# Altium PCB Chronos.PcbDoc (part 6 of 6)
Units mm, origin at the board's own origin, x right, y up, seen from the top; angles counter-clockwise.
Board outline 74.94 x 59.01 mm, 8 copper layers (TOP, L02_GND, L03_SIG, L04_PWR, L05_GND, L06_SIG, L07_GND, BOTTOM), stack 1.624 mm thick; 413 components, 238 nets, 1566 pads, 873 vias.
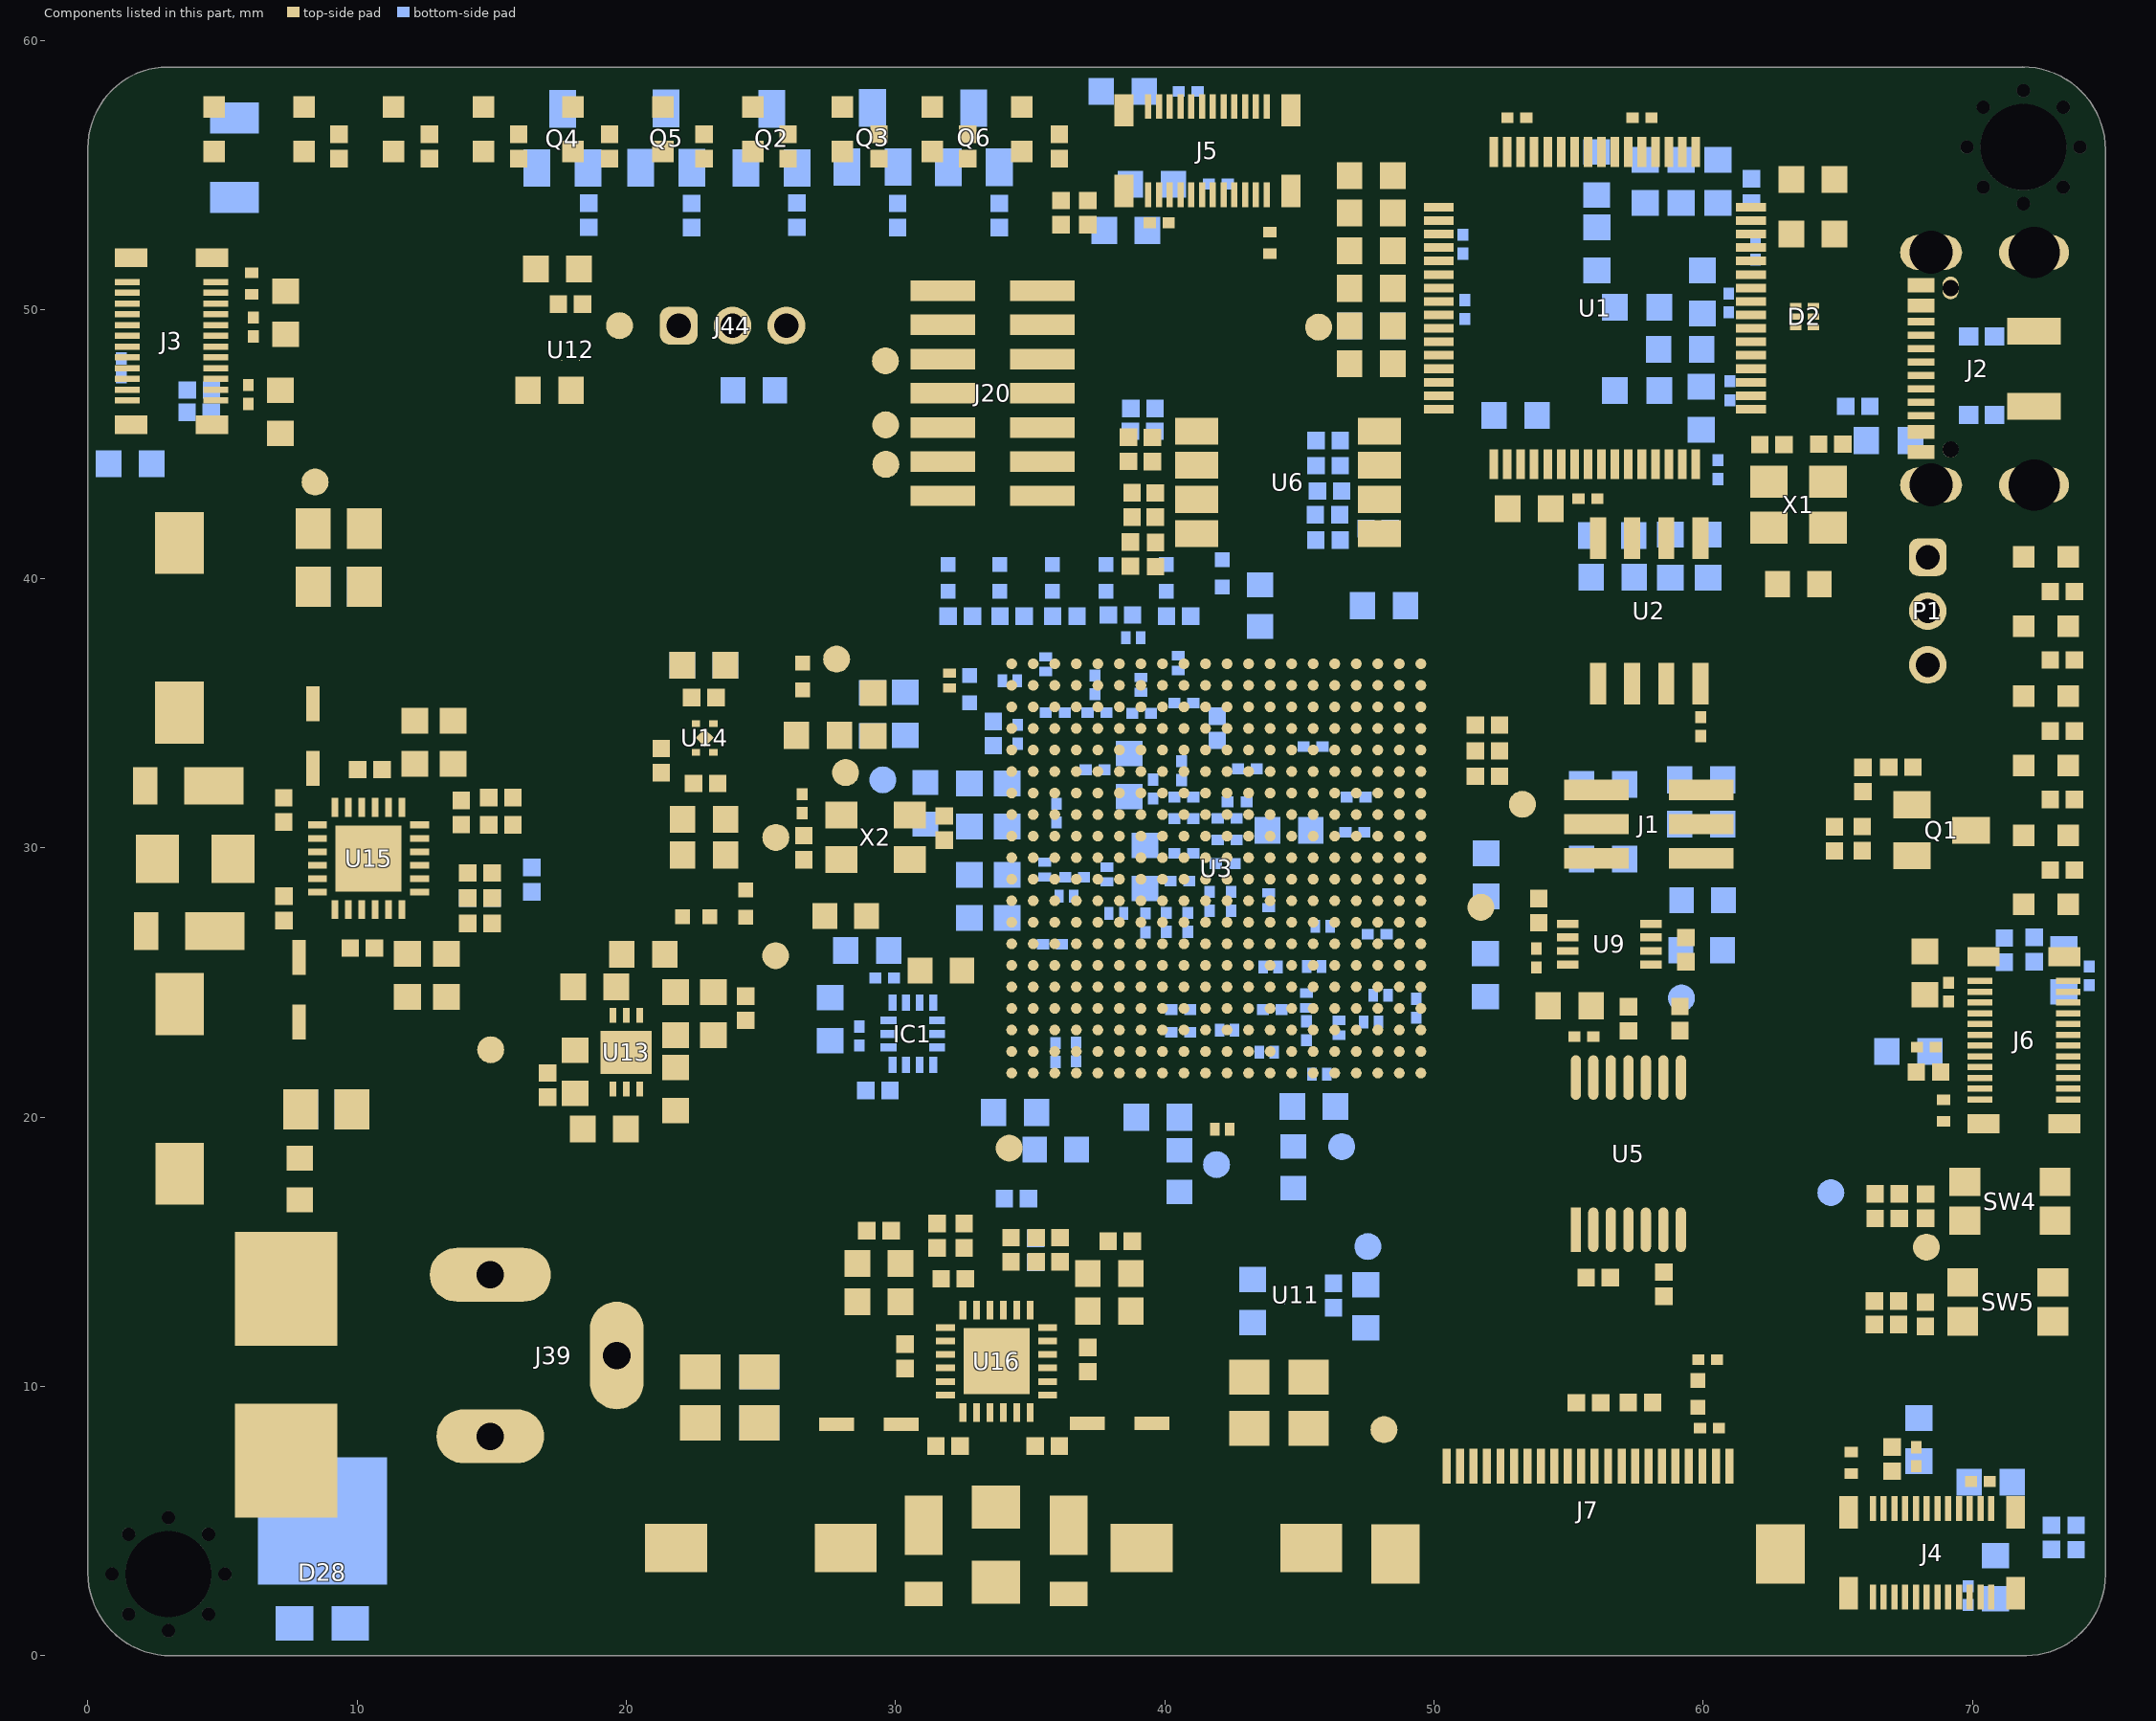
[diagram p11: the components of this part, seen from the top]

## Polygon pours and split planes (outlines as drawn) (continued)
GND on TOP "TOP-GND" (solid, remove dead copper, pour order 130): 3.434,30.625 3.434,28.56 2.687,27.812 2.687,26.252 2.456,26.021 0.813,26.021 0.638,26.197 0.638,32.99 0.83,33.183 2.51,33.183 2.618,33.075 2.618,31.472 3.434,30.656
GND on TOP "GND_L01_P126" (solid, pour order 126): 22.692,37.452 22.692,34.647 23.252,34.088 22.945,33.78 22.945,33.37 20.745,33.37 20.745,37.4 20.945,37.6 22.545,37.6
GND on TOP "GND_L01_P125" (solid, pour order 125): 17.554,25.348 17.538,25.331 17.173,25.331 16.785,24.943 16.785,21.357 16.828,21.4 24.745,21.4 24.745,24.113 24.754,24.123 23.53,25.348 18.504,25.348
V2P8 on TOP "V2P8_L01_P117" (solid, pour order 117): 18.122,48.88 17.945,49.058 17.945,50.825 17.766,51.003 17.766,52.6 19.945,52.6 20.145,52.4 20.145,51 19.945,50.8 18.976,50.8 18.745,50.569 18.745,48.6 18.399,48.6 18.197,48.802
GND on TOP "GND_L01_P120" (solid, pour order 120): 16.945,45.6 16.945,48.298 17.047,48.4 17.827,48.4 18.117,48.69 17.797,49.01 17.797,50.548 17.345,51 17.345,52.6 15.745,52.6 15.545,52.4 15.545,45.8 15.745,45.6
V1P8_LDO on TOP "V1P8_LDO_L01_P054" (solid, pour order 54): 20.37,23.516 20.37,25.148 22.529,25.148 22.829,25.448 22.829,26.573 22.829,27.826 24.754,27.826 24.754,26.573 24.754,24.123 21.792,24.123 21.185,23.516
NetFB8_1 on TOP "NETFB8_1_L01_P067" (solid, pour order 67): 22.545,27.2 22.545,30.224 22.562,30.241 21.612,30.241 21.612,27.148 21.613,27.147 22.545,27.147
VCCIO0 on TOP "VCCIO0_L01_P062" (solid, pour order 62): 39.363,42 39.537,42.175 41.98,42.175 41.98,41.036 41.945,41 37.145,41 36.945,41.2 36.945,41.8 37.145,42
V3P3 on TOP "V3P3_L01_P055" (solid, pour order 55): 23.643,19.648 23.643,21.048 20.888,21.048 20.62,21.316 20.37,21.316 20.37,20.108 20.829,19.648
NetC156_2 on TOP "TOP-N17079096" (solid, remove dead copper, pour order 9): 29.263,7.315 29.263,9.397 30.826,9.397 31.072,9.151 32.131,9.151 32.377,9.397 32.633,9.397 32.643,9.388 32.643,8.675 32.426,8.458 31.916,8.458 31.817,8.36 31.817,7.44 31.693,7.315
NetC157_1 on TOP "TOP-N17079015" (solid, remove dead copper, pour order 8): 34.863,9.374 34.863,8.546 34.942,8.467 35.653,8.467 35.742,8.378 35.742,8.199 35.742,7.456 35.78,7.417 37.859,7.417 37.937,7.495 37.937,8.874 37.937,9.194 37.733,9.398 36.661,9.398 36.427,9.163 35.371,9.163 35.136,9.398 34.886,9.398
NetC142_2 on TOP "TOP-N17076283" (solid, remove dead copper, pour order 3): 6.983,33.734 8.535,33.734 8.753,33.734 8.868,33.619 8.868,32.544 8.868,30.993 8.868,30.737 8.858,30.727 8.145,30.727 8.104,30.769 8.104,31.176 7.735,31.545 6.917,31.545 6.785,31.677 6.785,33.536
NetC143_2 on TOP "TOP-N17075942" (solid, remove dead copper, pour order 2): 8.822,29.037 7.179,29.037 6.245,28.103 3.902,28.103 3.307,27.507 3.307,26.286 2.431,25.41 2.431,23.068 2.696,22.804 5.202,22.804 6.259,22.804 6.473,23.018 6.473,24.158 6.473,27.399 6.932,27.858 7.653,27.858 7.709,27.914 7.709,28.28 8.157,28.728 8.211,28.728 8.881,28.728 8.881,28.979
V1P8 on TOP "V1P8_L01_P015" (solid, pour order 15): 43.945,2.8 46.993,2.8 46.993,9.151 46.745,9.4 38.548,9.4 38.548,7.401 42.944,7.401 43.945,6.4
NetC73_1 on TOP "NETC73_1_L01_P049" (solid, pour order 49): 60.117,9.55 60.117,6.375 59.355,6.375 cw(c59.355,6.401) 59.33,6.401 59.33,9.55
NetC157_2 on TOP "TOP-N17078984" (solid, remove dead copper, pour order 12): 34.373,9.386 34.373,8.562 34.373,7.599 34.847,7.125 35.738,6.234 35.738,4.096 35.738,3.747 37.155,3.747 37.953,2.948 40.295,2.948 40.56,3.213 40.56,5.719 40.56,6.776 40.346,6.99 39.206,6.99 35.719,6.99 35.505,7.204 35.505,8.17 35.449,8.226 34.933,8.226 34.636,8.523 34.636,8.727 34.636,9.398 34.385,9.398
NetC156_1 on TOP "TOP-N17079109" (solid, remove dead copper, pour order 11): 33.131,9.395 33.131,8.174 33.131,7.387 32.274,6.53 32.274,4.167 31.827,3.72 30.394,3.72 29.443,2.769 26.716,2.769 26.716,5.997 27.313,6.593 31.338,6.593 32.083,7.339 32.083,8.12 32.106,8.143 32.68,8.143 32.765,8.228 32.868,8.331 32.868,8.684 32.871,8.686 32.871,9.386 32.879,9.395
+12.0V on TOP "TOP-+12.0V 3" (solid, remove dead copper, pour order 10): 33.368,9.388 33.368,7.234 32.767,6.633 32.767,4.089 34.806,4.089 34.806,6.581 34.15,7.237 34.15,9.379 34.141,9.388
NetC142_1 on TOP "TOP-N17076208" (solid, remove dead copper, pour order 4): 8.878,30.232 7.657,30.232 7.022,30.232 6.841,30.413 6.165,31.089 3.65,31.089 3.203,31.536 3.203,32.969 2.371,33.801 2.371,36.382 2.44,36.451 5.676,36.451 6.076,36.051 6.076,31.897 6.693,31.28 7.932,31.28 7.932,30.73 8.167,30.495 8.17,30.492 8.869,30.492 8.878,30.484
+12.0V on TOP "+12.0V_L01_P001" (solid, pour order 1): 8.958,29.997 7.107,29.997 6.371,30.734 3.983,30.734 3.983,28.473 6.396,28.473 7.158,29.235 8.962,29.235
GND on BOTTOM "GND_L08_P153" (solid, pour order 153): 42.185,31.514 42.563,31.514 42.563,32.156 43.646,32.156 43.646,32.743 39.39,32.743 39.368,32.765 39.368,32.315 40.825,32.315 40.825,28.969 38.767,28.969 38.767,27.36 41.366,27.36 41.366,28.005 44.496,28.005 44.496,28.651 42.185,28.651
V1P8 on BOTTOM "V1P8_L08_P148" (solid, pour order 148): 2.004,46.556 2.845,45.715 2.845,43.772 1.895,43.772 1.895,44.852 0.637,46.11 0.293,46.11 0.293,47.644 0.453,47.803 1.824,47.803 2.004,47.623
V1P8 on BOTTOM "V1P8_L08_P147" (solid, pour order 147): 41.016,58.75 41.016,57.634 40.761,57.379 38.705,57.379 38.705,58.649 38.795,58.739
V1P8 on BOTTOM "BOTTOM-V1P8" (solid, pour order 144): 40.628,7.597 40.679,1.958 42.584,0.053 72.484,0.053 ccw(c72.02,2.806) 74.773,2.342 74.773,25.128 72.055,25.128 70.91,23.983 70.91,2.596 45.253,2.596 43.861,3.988 43.861,8.966 43.404,9.423 42.363,9.423 41.916,9.87 41.916,12.56 42.551,13.195 44.015,13.195 44.261,12.95 44.651,12.95 44.651,13.742 44.643,13.75 44.651,13.758 44.651,14.285 44.481,14.455 40.679,14.455 40.679,9.49 40.679,9.002 40.628,8.951
GND on BOTTOM "GND_L08_P145" (solid, pour order 145): 42.769,12.853 44.676,12.853 44.861,13.037 44.493,13.405 44.861,13.773 45.38,13.253 46.594,13.253 46.794,13.053 48.522,13.053 48.522,11.265 47.12,9.863 42.51,9.863 42.218,10.155 42.234,10.171 42.234,12.852 42.769,12.852
V1P2 on BOTTOM "V1P2_L08_P083" (solid, remove dead copper, pour order 83): 45.071,14.343 45.165,14.438 48.306,14.438 48.545,14.2 48.545,13.404 48.443,13.303 46.969,13.303 46.766,13.506 45.315,13.506 45.071,13.75
V1P8 on BOTTOM "V1P8_L08_P086" (solid, remove dead copper, pour order 86): 72.945,24.8 74.745,24.8 74.745,23.4 72.945,23.4
VCCIO6 on BOTTOM "VCCIO6_L08_P128" (solid, pour order 128): 34.945,27.875 30.877,27.875 30.745,27.743 30.745,26.4 31.145,26 34.145,26 34.945,26.8
VCCIO2 on BOTTOM "VCCIO2_L08_P114" (solid, pour order 114): 59.945,27 47.32,27 47.32,24.8 48.345,24.8 48.745,24.4 48.745,24.175 50.12,24.175 51.345,25.4 59.945,25.4
VCCIO1 on BOTTOM "VCCIO1_L08_P108" (solid, pour order 108): 51.32,28.8 56.345,28.8 56.545,29 56.545,30.2 57.945,30.2 58.545,30.8 58.545,33.4 59.745,33.4 59.945,33.2 59.945,30.2 70.745,30.2 72.345,31.8 72.345,40.32 73.545,40.32 73.545,31 71.545,29 60.345,29 59.945,28.6 59.945,27.2 49.745,27.2 47.235,29.709 47.235,32.094 50.251,32.094 51.145,31.2 51.145,28.975
GND on BOTTOM "GND_L08_P133" (solid, pour order 133): 9.728,38.839 12.055,38.839 12.055,42.841 12.073,42.859 12.064,42.868 9.611,42.868 9.611,38.957
GND on BOTTOM "GND_L08_P070" (solid, remove dead copper, pour order 70): 5.945,1.8 5.945,0.2 17.945,0.2 21.345,3.6 21.345,12.6 20.545,13.4 18.545,13.4 18.345,13.2 18.345,9.8 17.745,9.2 12.945,9.2 12.745,9 12.745,2.6 11.945,1.8
GND on BOTTOM "GND_L08_P132" (solid, pour order 132): 9.16,19.544 9.304,19.4 12.345,19.4 12.345,21.2 12.145,21.4 9.145,21.4
V1P8 on BOTTOM "V1P8_L08_P082" (solid, remove dead copper, pour order 82): 42.769,14.453 44.483,14.453 44.651,14.285 44.651,13.75 44.643,13.75 44.493,13.6 44.493,13.21 44.501,13.21 44.651,13.06 44.651,12.95 44.261,12.95 43.908,13.303 41.069,13.303 41.069,14.17 41.331,14.431
+12.0V on BOTTOM "+12.0V_L08_P073" (solid, remove dead copper, pour order 73): 9.945,15 9.145,15.8 2.145,15.8 1.345,15 1.345,10.4 1.745,10 9.545,10 9.945,10.4
NetC27_1 on BOTTOM "NETC27_1_L08_P068" (solid, pour order 68): 32.47,35.675 32.47,34.349 34.984,34.328 35.149,34.493 35.149,35.2 33.494,35.2 33.02,35.675
VCC_CORE_V1P0 on BOTTOM "VCC_CORE_V1P0_L08_P064" (solid, pour order 64): 32.145,34.8 28.545,34.8 28.545,33.6 32.145,33.6
VCCIO7 on BOTTOM "VCCIO7_L08_P056" (solid, pour order 56): 36.571,31.4 36.622,31.451 36.622,32.639 37.226,32.639 37.308,32.721 37.308,33.401 36.622,33.401 36.419,33.198 36.394,33.2 30.625,33.2 30.625,31.925 34.819,31.925 35.345,31.4
VCCIO4 on BOTTOM "VCCIO4_L08_P052" (solid, pour order 52): 40.545,24.6 40.545,23 41.02,22.525 41.02,18.325 41.03,18.315 39.945,18.315 39.945,24.625
VCCIO3 on BOTTOM "VCCIO3_L08_P051" (solid, pour order 51): 44.345,18.458 44.345,23.575 44.12,23.8 44.12,24.6 45.005,24.6 45.018,24.613 45.065,24.566 45.065,23.091 46.054,23.091 46.145,23 46.145,22.204 45.219,22.204 45.219,18.458
VCCIO0 on L04_PWR "NONET_L-01_P-001" (solid, pour order 105): 27.545,49.6 37.745,49.6 51.145,36.2 51.145,33.4 50.745,33 45.945,33 45.485,33.46 45.485,38.86 42.745,41.6 25.945,41.6 25.945,48
VCCIO6 on L04_PWR "VCCIO6_L04_P079" (solid, pour order 79): 36.765,29.453 36.765,25.621 31.524,25.621 30.069,27.076 30.069,30.276 29.509,30.836 25.929,30.836 25.745,31.02 25.745,31.413 25.931,31.6 30.808,31.6 31.128,31.28 31.128,28.217 32.024,27.32 34.945,27.32 34.945,28.579 35.795,29.453
VCCIO6 on L04_PWR "L04_PWR-VCCIO6" (solid, remove dead copper, pour order 138): 74.787,23.441 74.39,23.441 73.252,24.58 73.252,27.648 71.553,29.23 66.387,34.396 66.387,57.558 65.35,58.595 3.387,58.595 1.596,56.803 1.596,44.437 4.184,44.437 4.184,55.776 5.008,56.6 61.345,56.6 62.987,54.957 62.987,31.194 66.345,27.837 66.345,25.6 70.49,25.6 71.037,25.054 71.037,2.8 53.945,2.8 50.545,6.2 50.545,19.351 49.698,20.195 37.332,20.195 36.765,20.761 36.765,25.621 31.524,25.621 31.524,19.257 32.392,18.39 36.528,18.39 46.528,18.39 47.345,17.573 47.345,2.2 48.689,0.855 73.448,0.855 74.787,2.195
V2P8 on L04_PWR "V2P8_L04_P109" (solid, pour order 109): 54.072,3.072 71.017,3.072 71.017,24.788 70.404,25.4 66.345,25.4 66.345,23.6 68.945,23.6 68.945,6.2 68.745,6 56.145,6 54.145,8 54.145,16.4 56.745,19 56.745,30.2 53.545,33.4 53.545,38.6 40.545,51.6 17.145,51.6 17.145,50 17.345,49.8 37.745,49.8 51.345,36.2 51.345,33.112 50.745,32.512 50.745,6.4
V1P2 on L04_PWR "V1P2_L04_P116" (solid, pour order 116): 11.145,53.8 9.856,52.511 9.856,48.4 6.745,48.4 6.745,55 8.345,56.6 13.945,56.6 60.945,56.6 62.67,54.875 62.67,31.075 66.145,27.6 66.145,23.8 66.545,23.4 68.645,23.4 68.645,6.5 68.345,6.2 62.345,6.2 61.945,6.6 61.945,27.2 59.887,29.257 59.887,48.769 54.856,53.8
V1P8 on L04_PWR "V1P8_L04_P141" (solid, remove dead copper, pour order 141): 67.166,39.172 67.778,39.784 74.318,39.784 74.852,39.251 74.852,23.704 74.589,23.441 73.811,23.441 73.295,23.957 73.295,36.543 72.004,37.833 67.849,37.833 67.28,38.402 cw(c67.603,38.725) 67.147,38.745
V1P8_VCCAUX on L04_PWR "L04_PWR-V1P8_VCCAUX" (solid, pour order 107): 42.611,25.4 43.745,26.533 43.745,27.71 41.659,27.71 40.749,26.8 39.945,26.8 39.945,28.835 40.11,29 42.155,29 42.315,28.84 42.935,29.46 42.935,30.023 42.224,30.735 40.696,30.735 40.696,32.04 37.785,32.04 31.883,32.04 31.276,31.433 31.276,28.068 33.945,25.4
V1P8 on L04_PWR "V1P8_L04_P101" (solid, remove dead copper, pour order 101): 29.866,28.524 29.866,27.056 29.867,27.056 31.145,25.712 31.145,19.6 32.545,18.2 46.345,18.2 46.945,17.6 46.945,6.8 40.545,6.8 40.545,15.747 31.198,15.747 27.745,19.2 27.745,24 26.545,25.2 24.945,25.2 24.945,26.8 24.945,28.2 23.945,29.2 23.945,32 25.171,32 25.345,31.826 25.345,30 26.545,28.8 29.59,28.8
V3P3 on L04_PWR "L04_PWR-V3P3" (solid, pour order 129): 7.065,19.6 23.745,19.6 23.945,19.8 23.945,21.568 23.043,22.469 19.614,22.469 18.868,23.216 18.868,47.877 16.945,49.8 16.945,51.8 40.545,51.8 53.745,38.6 53.745,33.4 58.345,28.8 58.345,6.6 58.745,6.2 61.345,6.2 61.745,6.6 61.745,27 59.887,28.857 59.887,48.457 54.545,53.8 13.945,53.8 13.545,53.4 13.545,46.2 15.345,44.4 15.345,24.8 13.345,22.8 6.971,22.8 6.745,22.573 6.745,19.921
V1P8_LDO on L04_PWR "V1P8_LDO_L04_P099" (solid, remove dead copper, pour order 99): 24.304,32.36 30.12,32.36 30.628,32.868 30.628,36.485 30.743,36.6 32.545,36.6 32.545,38.2 32.945,38.6 41.945,38.6 43.145,39.8 43.145,40.8 42.545,41.4 41.145,41.4 41.145,40.5 40.844,40.2 39.978,40.2 39.578,40.6 35.945,40.6 35.345,40 27.945,40 26.145,38.2 26.145,36.8 25.159,35.814 22.297,35.814 22.145,35.662 22.145,25.2 24.745,25.2 24.945,25.4 24.945,28.2 23.945,29.2 23.945,32
+12.0V on L04_PWR "L04_PWR-+12.0V" (solid, remove dead copper, pour order 104): 1.145,6.6 1.945,5.8 5.93,5.8 7.674,4.056 35.201,4.056 35.545,4.4 35.545,6 35.145,6.4 16.745,6.4 12.545,6.4 10.145,8.8 10.145,15.4 9.345,16.2 6.945,16.2 6.345,16.8 6.345,22.834 6.711,23.2 8.945,23.2 8.945,26.6 8.945,30.6 8.345,31.2 2.745,31.2 2.345,30.8 2.345,16.8 1.145,15.6
VCC_CORE_V1P0 on L04_PWR "VCC_CORE_V1P0_L04_P066" (solid, pour order 66): 27.545,8.017 27.545,19 27.545,24 26.545,25 22.145,25 21.945,25.2 21.945,35.462 22.474,35.992 22.745,35.992 22.745,40.878 22.297,41.326 19.782,41.326 19.145,40.688 19.145,23.6 19.745,23 24.345,23 24.345,8.061 24.806,7.6 27.128,7.6
VCCIO1 on L04_PWR "VCCIO1_L04_P112" (solid, pour order 112): 56.945,30.2 58.145,30.2 58.145,6.6 57.745,6.2 56.145,6.2 54.345,8 54.345,16.4 56.945,19
NetC124_1 on L04_PWR "NONET_L-01_P-001" (solid, pour order 81): 45.309,31.2 45.309,38.252 44.761,38.8 42.707,38.8 42.345,38.438 42.345,37.2 42.945,36.6 42.945,34.387 43.649,33.683 43.649,32.838 43.145,32.334 43.145,31.466 43.411,31.2
V1P0_LDO on L04_PWR "V1P0_LDO_L04_P098" (solid, remove dead copper, pour order 98): 40.145,41.4 34.945,41.4 23.545,41.4 22.945,40.8 22.945,36.436 23.381,36 25.345,36 26.145,36.8 26.145,38.2 27.945,40 35.345,40 36.145,40.8 39.745,40.8 40.345,40.2 40.844,40.2 41.095,40.45
VCC_CORE_V1P0 on L04_PWR "L04_PWR-VCC_CORE_V1P0" (solid, pour order 84): 40.503,30.486 40.822,30.735 41.982,30.734 42.215,30.733 42.727,30.242 42.889,30.242 42.889,29.707 42.182,29 40.11,29 39.945,28.835 39.945,26.8 40.749,26.8 40.982,27.033 41.561,27.033 42.329,27.8 43.745,27.8 43.745,33.6 43.545,33.8 32.745,33.8 32.545,34 32.545,34.6 32.345,34.8 30.945,34.8 30.745,34.6 30.745,32.4 30.945,32.2 40.489,32.2 40.489,31.307 40.181,30.998 40.079,30.998 40.079,30.742 40.335,30.486
GND on L02_GND "GND_L02_P122" (solid, pour order 122): 0.904,0.898 0.898,0.904 cw(c3.066,3.072) 0,3.072 0,55.985 cw(c3.066,55.985) 0.898,58.153 cw(c2.942,56.11) 2.942,59 71.945,59 71.871,59.009 cw(c71.871,55.943) 74.039,58.111 74.045,58.105 cw(c71.877,55.937) 74.943,55.937 74.943,3.023 cw(c71.877,3.023) 74.045,0.855 cw(c72.001,2.899) 72.001,0.009 cw(c71.98,0.03) 71.98,0 3.072,0 cw(c3.072,3.066)
GND on L05_GND "GND_L05_P123" (solid, pour order 123): 0.904,0.898 0.898,0.904 cw(c3.066,3.072) 0,3.072 0,55.985 cw(c3.066,55.985) 0.898,58.153 cw(c2.942,56.11) 2.942,59 71.945,59 71.871,59.009 cw(c71.871,55.943) 74.039,58.111 74.045,58.105 cw(c71.877,55.937) 74.943,55.937 74.943,3.023 cw(c71.877,3.023) 74.045,0.855 cw(c72.001,2.899) 72.001,0.009 cw(c71.98,0.03) 71.98,0 3.072,0 cw(c3.072,3.066)
GND on L07_GND "GND_L07_P134" (solid, pour order 134): 0.904,0.898 0.898,0.904 cw(c3.066,3.072) 0,3.072 0,55.985 cw(c3.066,55.985) 0.898,58.153 cw(c2.942,56.11) 2.942,59 71.945,59 71.871,59.009 cw(c71.871,55.943) 74.039,58.111 74.045,58.105 cw(c71.877,55.937) 74.943,55.937 74.943,3.023 cw(c71.877,3.023) 74.045,0.855 cw(c72.001,2.899) 72.001,0.009 cw(c71.98,0.03) 71.98,0 3.072,0 cw(c3.072,3.066)
GND on L03_SIG "GND_L03_P150" (solid, pour order 150): 0.904,0.898 0.898,0.904 cw(c3.066,3.072) 0,3.072 0,55.985 cw(c3.066,55.985) 0.898,58.153 cw(c2.942,56.11) 2.942,59 71.945,59 71.871,59.009 cw(c71.871,55.943) 74.039,58.111 74.045,58.105 cw(c71.877,55.937) 74.943,55.937 74.943,3.023 cw(c71.877,3.023) 74.045,0.855 cw(c72.001,2.899) 72.001,0.009 cw(c71.98,0.03) 71.98,0 3.072,0 cw(c3.072,3.066)
GND on L06_SIG "GND_L06_P151" (solid, pour order 151): 0.904,0.898 0.898,0.904 cw(c3.066,3.072) 0,3.072 0,55.985 cw(c3.066,55.985) 0.898,58.153 cw(c2.942,56.11) 2.942,59 71.945,59 71.871,59.009 cw(c71.871,55.943) 74.039,58.111 74.045,58.105 cw(c71.877,55.937) 74.943,55.937 74.943,3.023 cw(c71.877,3.023) 74.045,0.855 cw(c72.001,2.899) 72.001,0.009 cw(c71.98,0.03) 71.98,0 3.072,0 cw(c3.072,3.066)

## Keep-outs
Keep-Out Layer:
  lines w0.2: 71.871,59.009 cw(c71.871,55.943) 74.039,58.111 ; 71.945,59 2.942,59 ccw(c2.942,56.11) 0.898,58.153 ccw(c3.066,55.985) 0,55.985 0,3.072 ccw(c3.066,3.072) 0.898,0.904 0.904,0.898 ccw(c3.072,3.066) 3.072,0 4.145,0 70.545,0 71.98,0 ccw(c71.98,0.03) 72.001,0.009 ccw(c72.001,2.899) 74.045,0.855 ccw(c71.877,3.023) 74.943,3.023 74.943,55.937 ccw(c71.877,55.937) 74.045,58.105

## Other copper
TOP:
  region net GND: 6.336,51.161 6.343,51.168 6.556,51.168 6.556,52.151 6.513,52.194 5.657,52.194 5.657,51.161
  region net V2P8: 69.329,6.113 70.013,6.113 70.185,6.284 70.185,6.894 70.105,6.974 69.309,6.974 69.216,6.881 69.216,6.226
  region net V1P2: 8.398,49.712 6.848,49.712 6.848,48.485 6.869,48.463 8.479,48.463 8.479,49.632
  region net NetD28_3: 5.459,3.427 5.459,9.035 5.717,9.293 9.466,9.293 10.745,10.571 10.745,15.6 11.145,16 17.945,16 18.145,15.8 18.145,11.6 16.345,9.8 13.145,9.8 12.345,9 12.345,3.4 11.345,2.4 6.485,2.4
  region net GND: 9.617,42.609 9.617,38.95 11.695,38.95 11.745,39 11.745,42.6
  region net GND: 31.945,2.8 32.745,3.6 34.745,3.6 35.545,2.8 37.545,2.8 37.545,0.6 29.545,0.6 29.545,2.2 30.145,2.8
  region net V2P8: 68.741,25.029 68.57,25.2 67.145,25.2 67.145,24.064 68.738,24.064
  region net NetFB7_1: 26.82,33.682 26.82,36.162 25.842,36.162 25.842,33.682
  region net V1P0_LDO: 23.343,34.337 23.162,34.518 23.133,34.518 23.003,34.648 23.003,37.458 23.145,37.6 26.745,37.6 26.945,37.4 26.945,36.725 26.82,36.6 25.945,36.6 25.545,36.2 25.545,34.8 24.945,34.2 23.45,34.2 23.313,34.337
  region net V1P8: 23.133,29.241 23.133,33.658 23.313,33.837 23.313,33.838 24.507,33.838 24.745,33.6 24.745,29.241
  region net V3P3: 8.809,24.104 8.809,17.894 6.861,17.894 6.861,24.112 7.037,24.288 8.63,24.284
  region net NetL15_1: 8.598,17.678 6.447,17.678 4.847,19.279 2.434,19.279 2.231,19.075 2.231,16.586 2.417,16.4 8.598,16.4
  region net NetC143_1: 8.862,28.485 8.047,28.485 8.047,27.94 7.77,27.663 6.955,27.663 6.955,25.324 7.133,25.146 8.708,25.146 8.862,25.301
L03_SIG:
  pour cut-out: 8.345,48 8.276,48.069 8.276,50.165 5.419,50.165 5.355,50.101 5.355,47.93
  pour cut-out: 69.82,4.762 69.82,2.032 69.583,2.032 68.705,2.91 68.705,4.823 69.778,4.823 69.819,4.782
L06_SIG:
  pour cut-out: 49.589,4.28 54.008,4.28 55.126,5.397 55.126,10.405 55.756,11.035 62.455,11.035 63.533,9.957 63.533,0.292 70.12,0.292 70.12,16.895 73.637,20.411 73.637,23.387 71.532,25.492 71.532,37.213 47.949,37.213 46.807,38.354 46.807,56.464 45.446,57.826 39.178,57.826 38.235,56.883 38.235,52.667 31.275,45.707 14.461,45.707 7.984,52.184 3.203,52.184 1.557,50.539 1.557,48.247 0.313,48.247 0.239,48.321 0.265,45.352 1.024,45.352 6.307,40.068 26.722,40.068 27.186,39.605 27.186,37.274 29.167,35.293 30.238,35.293 30.793,34.738 30.793,23.654 40.845,13.602 48.007,13.602 48.395,13.214 48.395,5.474
  pour cut-out: 34.935,35.42 36.1,36.584 36.1,36.882 35.554,37.428 33.81,35.684 33.81,35.272
BOTTOM:
  region net GND: 25.935,10.141 25.695,9.9 21.945,9.9 21.945,12.2 22.145,12.4 25.745,12.4 25.935,12.209
  region net GND: 24.913,24.892 24.913,21.311 17.775,21.311 17.775,24.892
  region net V3P3: 61.428,28.643 61.428,25.418 60.168,25.418 60.168,28.57 60.241,28.643
  region net GND: 9.094,30.991 9.094,28.298 11.817,28.298 11.817,30.991
  region net VCCIO0: 24.945,47.6 26.945,47.6 26.945,46.4 24.945,46.4
  region net V3P3: 8.745,22.8 6.745,22.8 6.745,19.4 8.745,19.4
  region net NetD28_3: 5.44,4.29 5.44,8.53 9.68,8.53 10.745,9.595 10.745,15.6 11.145,16 17.945,16 18.145,15.8 18.145,11.6 16.345,9.8 12.945,9.8 12.145,9 12.145,3.2 11.345,2.4 6.511,2.4 5.458,3.453
  region net V1P0_LDO: 23.203,37.286 25.059,37.286 25.145,37.2 25.145,36.2 24.945,36 23.242,36 23.207,36.035
  region net VCC_CORE_V1P0: 24.145,9.6 24.145,7.6 27.345,7.6 27.345,9.6
  region net V5P0: 9.206,40.691 7.006,40.691 7.006,37.389 9.206,37.389

## Silkscreen, mask and mechanical layers (free items; w line width, h text height)
Top Overlay:
  lines w0.127: 12.913,34.3 12.913,33.513 12.964,33.513 ; 14.284,32.827 14.284,33.487 ; 15.504,13.751 17.256,13.751
  text "2.8V" at 15.427,52.848 h1.02 r90
  text "1.8V" at 18.805,52.848 h1.02 r90
  text "1.0V" at 28.787,52.848 h1.02 r90
  text "12V" at 5.428,52.832 h1.02 r90
  text "5V" at 8.902,52.832 h1.02 r90
  text "1.2V" at 25.485,52.823 h1.02 r90
  text "3.3V" at 12.074,52.797 h1.02 r90
  text "ACT" at 35.479,52.807 h1.02 r90
  text "1.0VL" at 32.14,52.558 h1.02 r90
  text "1.8VL" at 22.081,52.532 h1.02 r90
  text "UART" at 34.463,52.4 h1.02 r90
  text "CHRONOS    V1.0" at 15.548,39.135 h1.52
OUTLINE_M:
  lines w0.025: -178.706,-235.788 -173.706,-235.788 ; -178.706,-185.788 -173.706,-185.788 ; -178.706,-135.788 -173.706,-135.788 ; -178.706,-85.788 -168.706,-85.788 ; -178.706,-35.788 -173.706,-35.788 ; -178.706,14.212 -173.706,14.212 ; -178.706,64.212 -173.706,64.212 ; -173.706,99.212 -13.706,99.212 ; -173.706,106.712 -13.706,106.712 ; -149.706,84.212 -149.706,106.712 ; -141.706,-290.788 -141.706,-285.788 ; -141.706,114.212 -141.706,119.212 ; -129.706,84.212 -129.706,106.712 ; -91.705,-290.788 -91.705,-285.788 ; -91.705,114.212 -91.705,119.212 ; -41.706,-290.788 -41.706,-285.788 ; -41.706,114.212 -41.706,119.212 ; -33.706,84.212 -33.706,106.712 ; -13.706,84.212 -13.706,114.212 ; 8.295,-290.788 8.295,-285.788 ; 8.295,114.212 8.295,119.212 ; 58.294,-290.788 58.294,-285.788 ; 58.294,114.212 58.294,119.212 ; 108.294,-290.788 108.294,-280.788 ; 108.294,109.212 108.294,119.212 ; 158.295,-290.788 158.295,-285.788 ; 158.295,114.212 158.295,119.212 ; 208.294,-290.788 208.294,-285.788 ; 208.294,114.212 208.294,119.212 ; 258.294,-290.788 258.294,-285.788 ; 258.294,114.212 258.294,119.212 ; 308.294,-290.788 308.294,-285.788 ; 308.294,114.212 308.294,119.212 ; 358.294,-290.788 358.294,-285.788 ; 358.294,114.212 358.294,119.212 ; 385.294,-85.788 395.295,-85.788 ; 390.295,-235.788 395.295,-235.788 ; 390.295,-185.788 395.295,-185.788 ; 390.295,-135.788 395.295,-135.788 ; 390.295,-35.788 395.295,-35.788 ; 390.295,14.212 395.295,14.212 ; 390.295,64.212 395.295,64.212 ; -178.706,-290.788 -178.706,119.212 395.295,119.212 395.295,-290.788 -178.706,-290.788 ; -173.706,-285.788 -173.706,114.212 390.295,114.212 390.295,-285.788 -173.706,-285.788
  text "12" at -169.246,114.962 h3.17
  text "11" at -119.245,114.962 h3.17
  text "10" at -69.246,114.962 h3.17
  text "9" at -17.976,114.962 h3.17
  text "8" at 32.025,114.962 h3.17
  text "7" at 82.024,114.962 h3.17
  text "6" at 132.025,114.962 h3.17
  text "5" at 182.024,114.962 h3.17
  text "4" at 232.024,114.962 h3.17
  text "3" at 282.025,114.962 h3.17
  text "2" at 332.024,114.962 h3.17
  text "1" at 382.024,114.962 h3.17
  text "REVISIONS" at -102.849,109.212 h2.54
  text "APPROVED" at -169.834,101.712 h2.54
  text "DATE" at -143.77,101.712 h2.54
  text "DESCRIPTION" at -92.882,101.712 h2.54
  text "REV" at -26.754,101.712 h2.54
  text "A" at -177.475,87.462 h3.17
  text "A" at 391.524,87.462 h3.17
  text "B" at -177.475,37.462 h3.17
  text "B" at 391.524,37.462 h3.17
  text "C" at -177.475,-12.538 h3.17
  text "C" at 391.524,-12.538 h3.17
  text "D" at -177.475,-62.538 h3.17
  text "D" at 391.524,-62.538 h3.17
  text "E" at -177.475,-112.538 h3.17
  text "E" at 391.524,-112.538 h3.17
  text "F" at -177.475,-162.538 h3.17
  text "F" at 391.524,-162.538 h3.17
  text "G" at -177.475,-212.538 h3.17
  text "G" at 391.524,-212.538 h3.17
  text "H" at -177.475,-262.538 h3.17
  text "H" at 391.524,-262.538 h3.17
  text "A2" at -169.246,-290.038 h3.17
  text "11" at -119.245,-290.038 h3.17
  text "10" at -69.246,-290.038 h3.17
  text "9" at -17.976,-290.038 h3.17
  text "8" at 32.025,-290.038 h3.17
  text "7" at 82.024,-290.038 h3.17
  text "6" at 132.025,-290.038 h3.17
  text "5" at 182.024,-290.038 h3.17
  text "4" at 232.024,-290.038 h3.17
  text "3" at 282.025,-290.038 h3.17
  text "2" at 332.024,-290.038 h3.17
  text "1" at 382.024,-290.038 h3.17
FAB_DATA:
  text "REFER NOTE 23" at 99.409,51.913 h2.54
  text "NOTES: UNLESS OTHERWISE SPECIFIED" at 168.656,49.24 h2.54
  text "REFER NOTE 23" at 99.48,45.406 h2.54
  text "1.  MATERIAL: FR-4" at 168.809,41.171 h2.54
  text "2.  GENERAL PLATING - ENIG" at 168.454,35.1 h2.54
  text "3.  ALL HOLES ARE PLATED THRU UNLESS OTHERWISE SPECIFIED" at 168.802,27.968 h2.54
  text "MINIMUM PLATING FOR ALL THRU HOLE SHOULD BE O.OO1\" Cu" at 176.01,22.266 h2.54
  text "4.  THROUGH HOLES PLATING THICKNESS SHOULD BE CONTROLLED BETWEEN 1.0 TO 1.5 MILS PER SIDE." at 168.568,16.322 h2.54
  text "5.  SILKSCREEN BOTH SIDES WITH NON-CONDUCTIVE WHITE INK" at 168.599,10.721 h2.54
  text "6.  FABRICATE PER DIMENSIONS SHOWN." at 168.751,5.743 h2.54
  text "7.  SOLDER MASK TOP AND BOTTOM SIDES WITH" at 168.624,0.968 h2.54
  text "LIQUID PHOTO IMAGABLE OR DRY FILM" at 169.208,-3.096 h2.54
  text "SOLDER MASK.  COLOR BLACK." at 169.107,-7.491 h2.54
  text "8.  TOTAL BOARD THICKNESS:  62 mil+/- 6 mil" at 169.005,-12.317 h2.54
  text "6 LAYER CONSTRUCTION." at 169.093,-16.33 h2.54
  text "REFER STACKUP" at 236.581,-16.553 h2.54
  text "9.  WARP & TWIST: SHALL NOT EXCEED 0.005 INCHES PER INCH" at 169.52,-22.879 h2.54
  text "10.  THIS IS A ROHS COMPLIANT BOARD" at 167.105,-29.126 h2.54
  text "11.  BOARD MUST BE UL 94V-1 APPROVED." at 167.554,-33.884 h2.54
  text "12.  FABRICATE BOARD PER IPC-A-600D STANDARD." at 167.554,-39.98 h2.54
  text "13.  CLIP SILKSCREEN ON NO MASK AREA." at 167.554,-44.933 h2.54
  text "14.  TEARDROPS SHOULD NOT BE ADDED ON ANY AREA WITHOUT PRIOR APPROVAL FROM PACTRON." at 167.486,-50.099 h2.54
  text "15.  NO VENDOR LOGO, ART WORKS SHOULD NOT BE" at 167.821,-55.321 h2.54
  text "CHANGED WITHOUT PRIOR APPROVAL FROM PACTRON" at 180.65,-60.955 h2.54
  text "16.  DEBURR ALL SHARP EDGES" at 167.976,-67.056 h2.54
  text "17.  REMOVE UNUSED PADS IN ALL INNER LAYERS." at 167.663,-71.829 h2.54
  text "18.  BOARD DIMENSIONS ARE IN INCHES[MM]." at 167.811,-76.573 h2.54
  text "19.  PROVIDE SOFT COPY OF TDR REPORT FOR OUTER LAYERS." at 167.841,-82.09 h2.54
  text "20.  ALL THE TRACE WIDTH MENTIONED IN IMPEDANCE TABLE ARE FINISHED TRACE WIDTH" at 167.994,-87.437 h2.54
  text "THERE SHOULD NOT BE ANY DEVIATIONS IN TRACE WIDTH AFTER MANUFACTURING" at 180.567,-91.755 h2.54
  text "21.  NICKEL CONTENT ON OUTER LAYERS SHOULD BE VERY MINIMAL POSSIBLE" at 168.248,-96.2 h2.54
  text "TRY TO ACHIEVE THICKNESS IN OUTER LAYER METAL WITH MORE COPPER INSTEAD OF MORE NICKEL" at 180.821,-100.518 h2.54
  text "22.  IF REQUIRED CAN IGNORE THE TRACES THAT ARE <0.5 INCH FOR TDR MEASUREMENT. BUT SETUP" at 168.121,-105.852 h2.54
  text "NEED TO BE DONE TO MEET IMPEDANCE REQUIREMENT" at 181.049,-110.805 h2.54
  text "23.  ALL THESE DRILLS  NEED TO BE NON CONDUCTIVE VIA PLUGGING FROM BOTTOM SIDE." at 167.806,-115.758 h2.54
  text "24.  ALL HOLE SIZES MENTIONED IN DRILL CHART SHOULD BE CONSIDERED AS FINISHED HOLE SIZE." at 167.762,-120.488 h2.54
FAB_DRAWING:
  text "FAB" at -7.049,-249.052 h1.6
  text "FAB DRAWING" at 268.295,-258.788 h2.54
  text "1 OF 1" at 384.199,-284.288 h2.54
PROBENUM_BOTTOM:
  text "TESTPIN NUMBER" at -41.706,-258.788 h2.54
  text "SECONDARY-SIDE" at -41.706,-263.788 h2.54
  text "2 OF 2" at -169.802,-284.288 h2.54
  text "2 OF 2" at -169.802,-284.288 h2.54
REFDES_BOTTOM:
  text "REFDES CENTER" at -41.706,-258.788 h2.54
  text "REFDES CENTER" at -41.706,-258.788 h2.54
  text "SECONDARY-SIDE" at -41.706,-263.788 h2.54
  text "SECONDARY-SIDE" at -41.706,-263.788 h2.54
  text "2 OF 2" at -169.802,-284.288 h2.54
ASSEMBLY_TOP:
  text "ASSEMBLY" at 268.295,-258.788 h2.54
  text "PRIMARY-SIDE" at 268.295,-263.788 h2.54
  text "1 OF 2" at 384.199,-284.288 h2.54
REFDES_TOP:
  text "REFDES CENTER" at 268.295,-258.788 h2.54
  text "PRIMARY-SIDE" at 268.295,-263.788 h2.54
  text "1 OF 2" at 384.199,-284.288 h2.54
PROBENUM_TOP:
  text "TESTPIN NUMBER" at 268.295,-258.788 h2.54
  text "PRIMARY-SIDE" at 268.295,-263.788 h2.54
  text "1 OF 2" at 384.199,-284.288 h2.54
PANEL_DRAWING:
  text "PANEL DRAWING" at 268.295,-258.788 h2.54
  text "2 OF 2" at 384.199,-284.288 h2.54
NCDRILL_LEGEND:
  text "DRILL LEGEND" at 268.295,-258.788 h2.54
  text "1 OF 2" at 384.199,-284.288 h2.54
PHOTOPLOT_OUTLINE:
  lines w0.025: -183.206,-295.288 -183.206,123.712 409.794,123.712 409.794,-295.288 -183.206,-295.288
DRAWING_ORIGIN:
  lines w0.025: -66.89,-172.4 -65.62,-172.4 ; -66.255,-173.035 -66.255,-171.765
Mechanical 255:
  lines w0.025: -46.962,-109.523 -46.962,-102.204 -39.396,-102.204 -39.396,-109.523 -46.962,-109.523 ; -24.832,-78.612 -24.832,-72.488 -13.581,-72.488 -13.581,-78.612 -24.832,-78.612 ; -19.598,-164.17 -19.598,-154.771 37.43,-154.771 37.43,-164.17 -19.598,-164.17 ; 11.088,-116.359 11.088,-98.969 27.598,-98.969 27.598,-116.359 11.088,-116.359 ; 52.38,-93.869 55.004,-93.869 55.004,-85.008 52.38,-85.008 52.38,-93.869 ; 54.206,-96.976 54.206,-94.352 63.949,-94.352 63.949,-96.976 54.206,-96.976 ; 54.374,-84.903 54.374,-82.278 64.117,-82.278 64.117,-84.903 54.374,-84.903 ; 64.054,-94.415 66.679,-94.415 66.679,-84.672 64.054,-84.672 64.054,-94.415

## Text inside footprints (layer, text, board x,y; h text height)
C1: PIN_NUMBER "1" at 56.276,42.977 h0.51; PIN_NUMBER "2" at 55.576,42.977 h0.51
C2: PIN_NUMBER "2" at 51.145,50.147 h0.51 r90; PIN_NUMBER "1" at 51.145,49.447 h0.51 r90
C3: PIN_NUMBER "1" at 58.283,57.121 h0.51; PIN_NUMBER "2" at 57.583,57.121 h0.51
C4: PIN_NUMBER "1" at 52.528,57.125 h0.51 r180; PIN_NUMBER "2" at 53.228,57.125 h0.51 r180
C5: PIN_NUMBER "2" at 52.738,42.393 h0.51; PIN_NUMBER "1" at 54.339,42.393 h0.51
C6: PIN_NUMBER "1" at 59.774,51.452 h0.51 r270; PIN_NUMBER "2" at 59.774,49.852 h0.51 r270
C7: PIN_NUMBER "2" at 60.955,50.388 h0.51 r90; PIN_NUMBER "1" at 60.955,49.688 h0.51 r90
C8: PIN_NUMBER "1" at 65.991,46.4 h0.51; PIN_NUMBER "2" at 65.091,46.4 h0.51
C9: PIN_NUMBER "1" at 60.992,47.535 h0.51 r270; PIN_NUMBER "2" at 60.992,46.835 h0.51 r270
C10: PIN_NUMBER "1" at 60.135,45.536 h0.51 r90; PIN_NUMBER "2" at 60.135,47.136 h0.51 r90
C11: PIN_NUMBER "2" at 51.075,52.572 h0.51 r90; PIN_NUMBER "1" at 51.075,51.872 h0.51 r90
C12: PIN_NUMBER "2" at 61.945,52.347 h0.51 r90; PIN_NUMBER "1" at 61.945,51.647 h0.51 r90
C13: PIN_NUMBER "1" at 60.548,44.608 h0.51 r270; PIN_NUMBER "2" at 60.548,43.908 h0.51 r270
C14: PIN_NUMBER "1" at 53.829,46.264 h0.51 r180; PIN_NUMBER "2" at 52.229,46.264 h0.51 r180
C15: PIN_NUMBER "2" at 59.912,34.363 h0.51 r90; PIN_NUMBER "1" at 59.912,35.063 h0.51 r90
C16: PIN_NUMBER "2" at 63.208,44.982 h0.51; PIN_NUMBER "1" at 62.307,44.982 h0.51
C17: PIN_NUMBER "2" at 64.091,45 h0.51 r180; PIN_NUMBER "1" at 64.991,45 h0.51 r180
C18: PIN_NUMBER "1" at 69.749,6.477 h0.51 r180; PIN_NUMBER "2" at 70.449,6.477 h0.51 r180
C19: PIN_NUMBER "1" at 67.915,6.838 h0.51 r270; PIN_NUMBER "2" at 67.915,7.538 h0.51 r270
C20: PIN_NUMBER "2" at 26.536,31.793 h0.51 r270; PIN_NUMBER "1" at 26.536,31.092 h0.51 r270
C21: PIN_NUMBER "1" at 69.88,6.246 h0.51; PIN_NUMBER "2" at 71.481,6.246 h0.51
C22: PIN_NUMBER "1" at 68.22,7.226 h0.51 r90; PIN_NUMBER "2" at 68.22,8.826 h0.51 r90
C23: PIN_NUMBER "1" at 71.065,2.121 h0.51 r90; PIN_NUMBER "2" at 71.065,3.721 h0.51 r90
C24: PIN_NUMBER "2" at 69.845,2.382 h0.51 r90; PIN_NUMBER "1" at 69.845,1.682 h0.51 r90
C25: PIN_NUMBER "2" at 39.291,35 h0.51; PIN_NUMBER "1" at 38.591,35 h0.51
C26: PIN_NUMBER "2" at 39.011,38.657 h0.51 r180; PIN_NUMBER "1" at 38.111,38.657 h0.51 r180
C27: PIN_NUMBER "2" at 34.542,34.074 h0.51 r270; PIN_NUMBER "1" at 34.542,34.774 h0.51 r270
C28: PIN_NUMBER "1" at 33.63,34.501 h0.51 r90; PIN_NUMBER "2" at 33.63,33.601 h0.51 r90
C29: PIN_NUMBER "2" at 40.856,35.386 h0.51; PIN_NUMBER "1" at 40.156,35.386 h0.51
C30: PIN_NUMBER "2" at 41.171,38.61 h0.51 r180; PIN_NUMBER "1" at 40.271,38.61 h0.51 r180
C31: PIN_NUMBER "2" at 37.631,35.03 h0.51; PIN_NUMBER "1" at 36.931,35.03 h0.51
C32: PIN_NUMBER "1" at 36.042,38.61 h0.51 r180; PIN_NUMBER "2" at 36.942,38.61 h0.51 r180
C33: PIN_NUMBER "2" at 37.41,36.204 h0.51 r90; PIN_NUMBER "1" at 37.41,35.504 h0.51 r90
C34: PIN_NUMBER "1" at 34.081,38.61 h0.51 r180; PIN_NUMBER "2" at 34.981,38.61 h0.51 r180
C35: PIN_NUMBER "2" at 35.788,35.03 h0.51 r180; PIN_NUMBER "1" at 36.488,35.03 h0.51 r180
C36: PIN_NUMBER "1" at 32.16,38.61 h0.51 r180; PIN_NUMBER "2" at 33.06,38.61 h0.51 r180
C37: PIN_NUMBER "2" at 7.354,45.396 h0.51 r90; PIN_NUMBER "1" at 7.354,46.996 h0.51 r90
C38: PIN_NUMBER "1" at 5.956,47.395 h0.51 r90; PIN_NUMBER "2" at 5.956,46.695 h0.51 r90
C39: PIN_NUMBER "2" at 7.139,50.677 h0.51 r270; PIN_NUMBER "1" at 7.139,49.077 h0.51 r270
C40: PIN_NUMBER "1" at 6.145,48.797 h0.51 r270; PIN_NUMBER "2" at 6.145,49.497 h0.51 r270
C41: PIN_NUMBER "1" at 2.37,44.475 h0.51 r180; PIN_NUMBER "2" at 0.77,44.475 h0.51 r180
C42: PIN_NUMBER "2" at 1.24,47.975 h0.51 r90; PIN_NUMBER "1" at 1.24,47.275 h0.51 r90
C44: PIN_NUMBER "1" at 39.353,53.137 h0.51 r180; PIN_NUMBER "2" at 37.752,53.137 h0.51 r180
C45: PIN_NUMBER "1" at 40.349,53.221 h0.51; PIN_NUMBER "2" at 39.649,53.221 h0.51
C46: PIN_NUMBER "1" at 40.322,54.859 h0.51 r180; PIN_NUMBER "2" at 38.722,54.859 h0.51 r180
C47: PIN_NUMBER "2" at 42.136,54.661 h0.51; PIN_NUMBER "1" at 41.436,54.661 h0.51
C48: PIN_NUMBER "1" at 39.244,58.304 h0.51 r180; PIN_NUMBER "2" at 37.643,58.304 h0.51 r180
C49: PIN_NUMBER "2" at 41.018,58.101 h0.51; PIN_NUMBER "1" at 40.318,58.101 h0.51
C52: PIN_NUMBER "2" at 32.948,29 h0.51 r90; PIN_NUMBER "1" at 32.948,27.4 h0.51 r90
C53: PIN_NUMBER "1" at 34.348,27.4 h0.51 r90; PIN_NUMBER "2" at 34.348,29 h0.51 r90
C54: PIN_NUMBER "1" at 35.278,26.428 h0.51; PIN_NUMBER "2" at 35.978,26.428 h0.51
C55: PIN_NUMBER "2" at 36.803,28.914 h0.51; PIN_NUMBER "1" at 36.103,28.914 h0.51
C56: PIN_NUMBER "1" at 32.541,32.4 h0.51 r270; PIN_NUMBER "2" at 32.541,30.8 h0.51 r270
C57: PIN_NUMBER "1" at 33.941,32.4 h0.51 r270; PIN_NUMBER "2" at 33.941,30.8 h0.51 r270
C58: PIN_NUMBER "1" at 51.711,26.081 h0.51 r270; PIN_NUMBER "2" at 51.711,24.481 h0.51 r270
C59: PIN_NUMBER "2" at 48.041,26.8 h0.51; PIN_NUMBER "1" at 47.341,26.8 h0.51
C60: PIN_NUMBER "2" at 49.345,23.903 h0.51 r270; PIN_NUMBER "1" at 49.345,24.603 h0.51 r270
C63: PIN_NUMBER "1" at 67.29,16.034 h0.51 r270; PIN_NUMBER "2" at 66.39,16.034 h0.51 r270
C64: PIN_NUMBER "1" at 52.148,28.2 h0.51 r90; PIN_NUMBER "2" at 52.148,29.8 h0.51 r90
C65: PIN_NUMBER "2" at 46.918,30.586 h0.51 r180; PIN_NUMBER "1" at 47.618,30.586 h0.51 r180
C66: PIN_NUMBER "2" at 46.964,31.894 h0.51 r180; PIN_NUMBER "1" at 47.664,31.894 h0.51 r180
C67: PIN_NUMBER "2" at 35.98,31.15 h0.51 r270; PIN_NUMBER "1" at 35.98,31.85 h0.51 r270
C68: PIN_NUMBER "2" at 37.56,32.901 h0.51; PIN_NUMBER "1" at 36.86,32.901 h0.51
C69: PIN_NUMBER "1" at 29.744,26.397 h0.51 r180; PIN_NUMBER "2" at 28.144,26.397 h0.51 r180
C70: PIN_NUMBER "2" at 29.449,25.173 h0.51 r180; PIN_NUMBER "1" at 30.149,25.173 h0.51 r180
C71: PIN_NUMBER "1" at 27.769,22.843 h0.51 r90; PIN_NUMBER "2" at 27.769,24.443 h0.51 r90
C72: PIN_NUMBER "2" at 28.655,23.164 h0.51 r90; PIN_NUMBER "1" at 28.655,22.464 h0.51 r90
C73: PIN_NUMBER "1" at 59.681,8.457 h0.51 r180; PIN_NUMBER "2" at 60.381,8.457 h0.51 r180
C74: PIN_NUMBER "1" at 47.344,38.797 h0.51; PIN_NUMBER "2" at 48.945,38.797 h0.51
C75: PIN_NUMBER "2" at 45.364,33.77 h0.51 r180; PIN_NUMBER "1" at 46.064,33.77 h0.51 r180
C76: PIN_NUMBER "2" at 66.361,12.098 h0.51 r270; PIN_NUMBER "1" at 67.261,12.098 h0.51 r270
C77: PIN_NUMBER "1" at 38.931,41.364 h0.51; PIN_NUMBER "2" at 38.931,40.464 h0.51
C78: PIN_NUMBER "2" at 39.655,40.248 h0.51 r270; PIN_NUMBER "1" at 39.655,41.148 h0.51 r270
C79: PIN_NUMBER "1" at 47.678,41.859 h0.51 r180; PIN_NUMBER "2" at 48.578,41.859 h0.51 r180
C80: PIN_NUMBER "1" at 39.436,46.324 h0.51; PIN_NUMBER "2" at 38.535,46.324 h0.51
C81: PIN_NUMBER "2" at 38.654,45.463 h0.51 r90; PIN_NUMBER "1" at 38.654,44.563 h0.51 r90
C91: PIN_NUMBER "2" at 33.643,20.381 h0.51 r180; PIN_NUMBER "1" at 35.243,20.381 h0.51 r180
C92: PIN_NUMBER "1" at 35.945,22.953 h0.51 r270; PIN_NUMBER "2" at 35.945,22.253 h0.51 r270
C93: PIN_NUMBER "1" at 36.705,22.977 h0.51 r270; PIN_NUMBER "2" at 36.705,22.277 h0.51 r270
C94: PIN_NUMBER "1" at 40.545,20.203 h0.51 r180; PIN_NUMBER "2" at 38.944,20.203 h0.51 r180
C95: PIN_NUMBER "2" at 40.741,23.151 h0.51; PIN_NUMBER "1" at 40.041,23.151 h0.51
C96: PIN_NUMBER "2" at 40.741,24 h0.51; PIN_NUMBER "1" at 40.041,24 h0.51
C97: PIN_NUMBER "1" at 59.615,10.998 h0.51 r180; PIN_NUMBER "2" at 60.315,10.998 h0.51 r180
C98: PIN_NUMBER "2" at 55.839,24.344 h0.51 r180; PIN_NUMBER "1" at 54.239,24.344 h0.51 r180
C99: PIN_NUMBER "1" at 53.81,25.361 h0.51 r270; PIN_NUMBER "2" at 53.81,26.061 h0.51 r270
C100: PIN_NUMBER "1" at 55.019,22.998 h0.51 r180; PIN_NUMBER "2" at 55.719,22.998 h0.51 r180
C101: PIN_NUMBER "1" at 68.037,24.554 h0.51 r270; PIN_NUMBER "2" at 68.037,26.155 h0.51 r270
C102: PIN_NUMBER "1" at 69.119,24.097 h0.51 r270; PIN_NUMBER "2" at 69.119,24.797 h0.51 r270
C103: PIN_NUMBER "1" at 68.427,22.649 h0.51 r180; PIN_NUMBER "2" at 66.827,22.649 h0.51 r180
C104: PIN_NUMBER "2" at 68.148,22.6 h0.51; PIN_NUMBER "1" at 68.848,22.6 h0.51
C105: PIN_NUMBER "1" at 73.606,24.66 h0.51 r90; PIN_NUMBER "2" at 73.606,26.26 h0.51 r90
C106: PIN_NUMBER "1" at 44.548,24 h0.51 r180; PIN_NUMBER "2" at 43.848,24 h0.51 r180
C107: PIN_NUMBER "2" at 45.265,23.362 h0.51 r90; PIN_NUMBER "1" at 45.265,22.662 h0.51 r90
C108: PIN_NUMBER "1" at 44.744,20.197 h0.51; PIN_NUMBER "2" at 46.345,20.197 h0.51
C109: PIN_NUMBER "2" at 43.066,12.378 h0.51 r270; PIN_NUMBER "1" at 43.066,13.978 h0.51 r270
C110: PIN_NUMBER "2" at 47.266,12.178 h0.51 r270; PIN_NUMBER "1" at 47.266,13.778 h0.51 r270
C111: PIN_NUMBER "1" at 17.945,46.797 h0.51; PIN_NUMBER "2" at 16.344,46.797 h0.51
C112: PIN_NUMBER "1" at 18.241,51.3 h0.51; PIN_NUMBER "2" at 16.641,51.3 h0.51
C113: PIN_NUMBER "2" at 40.625,32.725 h0.51 r270; PIN_NUMBER "1" at 40.625,33.425 h0.51 r270
C114: PIN_NUMBER "2" at 40.856,31.093 h0.51; PIN_NUMBER "1" at 40.156,31.093 h0.51
C115: PIN_NUMBER "2" at 40.712,28.769 h0.51; PIN_NUMBER "1" at 40.012,28.769 h0.51
C116: PIN_NUMBER "2" at 42.098,29.424 h0.51 r180; PIN_NUMBER "1" at 42.798,29.424 h0.51 r180
C117: PIN_NUMBER "2" at 42.174,31.1 h0.51 r180; PIN_NUMBER "1" at 42.874,31.1 h0.51 r180
C118: PIN_NUMBER "2" at 42.924,32.943 h0.51 r180; PIN_NUMBER "1" at 43.624,32.943 h0.51 r180
C119: PIN_NUMBER "2" at 40.055,27.381 h0.51 r90; PIN_NUMBER "1" at 40.055,26.681 h0.51 r90
C120: PIN_NUMBER "2" at 41.668,28.169 h0.51 r90; PIN_NUMBER "1" at 41.668,27.469 h0.51 r90
C121: PIN_NUMBER "1" at 28.943,35.768 h0.51 r270; PIN_NUMBER "2" at 28.943,34.167 h0.51 r270
C122: PIN_NUMBER "1" at 29.372,35.759 h0.51 r90; PIN_NUMBER "2" at 29.372,34.158 h0.51 r90
C123: PIN_NUMBER "2" at 30.153,34.182 h0.51 r270; PIN_NUMBER "1" at 30.153,35.782 h0.51 r270
C124: PIN_NUMBER "2" at 42.541,31.714 h0.51 r180; PIN_NUMBER "1" at 43.241,31.714 h0.51 r180
C125: PIN_NUMBER "1" at 45.421,30.865 h0.51 r180; PIN_NUMBER "2" at 43.821,30.865 h0.51 r180
C126: PIN_NUMBER "2" at 42.174,30.3 h0.51 r180; PIN_NUMBER "1" at 42.874,30.3 h0.51 r180
C127: PIN_NUMBER "2" at 39.284,27.367 h0.51 r90; PIN_NUMBER "1" at 39.284,26.667 h0.51 r90
C128: PIN_NUMBER "2" at 40.857,31.894 h0.51; PIN_NUMBER "1" at 40.157,31.894 h0.51
C129: PIN_NUMBER "2" at 40.855,27.381 h0.51 r90; PIN_NUMBER "1" at 40.855,26.681 h0.51 r90
C130: PIN_NUMBER "2" at 40.857,29.798 h0.51; PIN_NUMBER "1" at 40.157,29.798 h0.51
C131: PIN_NUMBER "2" at 42.468,28.169 h0.51 r90; PIN_NUMBER "1" at 42.468,27.469 h0.51 r90
C132: PIN_NUMBER "2" at 39.568,32.337 h0.51 r90; PIN_NUMBER "1" at 39.568,31.637 h0.51 r90
C133: PIN_NUMBER "2" at 38.477,31.908 h0.51 r270; PIN_NUMBER "1" at 38.477,33.508 h0.51 r270
C134: PIN_NUMBER "2" at 39.47,30.1 h0.51 r90; PIN_NUMBER "1" at 39.47,28.5 h0.51 r90
C135: PIN_NUMBER "2" at 22.087,30.862 h0.51; PIN_NUMBER "1" at 23.687,30.862 h0.51
C136: PIN_NUMBER "2" at 21.626,21.848 h0.51 r270; PIN_NUMBER "1" at 21.626,20.248 h0.51 r270
C137: PIN_NUMBER "2" at 22.078,36.582 h0.51; PIN_NUMBER "1" at 23.678,36.582 h0.51
C138: PIN_NUMBER "1" at 23.678,36.989 h0.51 r180; PIN_NUMBER "2" at 22.078,36.989 h0.51 r180
C139: PIN_NUMBER "2" at 22.033,23.048 h0.51 r90; PIN_NUMBER "1" at 22.033,24.648 h0.51 r90
C140: PIN_NUMBER "1" at 23.433,24.648 h0.51 r90; PIN_NUMBER "2" at 23.433,23.048 h0.51 r90
C141: PIN_NUMBER "1" at 4.875,29.604 h0.64 r270; PIN_NUMBER "2" at 2.076,29.604 h0.64 r270
C142: PIN_NUMBER "1" at 7.068,30.963 h0.51 r180; PIN_NUMBER "2" at 7.068,31.864 h0.51 r180
C143: PIN_NUMBER "1" at 7.074,27.306 h0.51 r180; PIN_NUMBER "2" at 7.074,28.206 h0.51 r180
C144: PIN_NUMBER "1" at 10.021,33.115 h0.51 r90; PIN_NUMBER "2" at 10.921,33.115 h0.51 r90
C145: PIN_NUMBER "1" at 10.642,26.08 h0.51 r270; PIN_NUMBER "2" at 9.742,26.08 h0.51 r270
C146: PIN_NUMBER "1" at 14.887,31.064 h0.51 r90; PIN_NUMBER "2" at 15.787,31.064 h0.51 r90
C147: PIN_NUMBER "1" at 13.661,30.868 h0.51 r180; PIN_NUMBER "2" at 13.661,31.768 h0.51 r180
C148: PIN_NUMBER "2" at 15.011,27.934 h0.51 r90; PIN_NUMBER "1" at 14.111,27.934 h0.51 r90
C149: PIN_NUMBER "1" at 14.111,28.34 h0.51 r90; PIN_NUMBER "2" at 15.011,28.34 h0.51 r90
C150: PIN_NUMBER "1" at 7.859,39.7 h0.64 r270; PIN_NUMBER "2" at 9.759,39.7 h0.64 r270
C151: PIN_NUMBER "2" at 9.759,39.7 h0.64 r270; PIN_NUMBER "1" at 7.859,39.7 h0.64 r270
C152: PIN_NUMBER "2" at 9.759,41.859 h0.64 r270; PIN_NUMBER "1" at 7.859,41.859 h0.64 r270
C153: PIN_NUMBER "1" at 7.402,20.295 h0.64 r270; PIN_NUMBER "2" at 9.302,20.295 h0.64 r270
C154: PIN_NUMBER "1" at 7.402,20.295 h0.64 r270; PIN_NUMBER "2" at 9.302,20.295 h0.64 r270
C155: PIN_NUMBER "2" at 33.734,2.223 h0.64; PIN_NUMBER "1" at 33.734,5.022 h0.64
C156: PIN_NUMBER "1" at 32.4,7.585 h0.51 r270; PIN_NUMBER "2" at 31.5,7.585 h0.51 r270
C157: PIN_NUMBER "1" at 36.083,7.585 h0.51 r270; PIN_NUMBER "2" at 35.183,7.585 h0.51 r270
C158: PIN_NUMBER "1" at 30.146,10.672 h0.51 r180; PIN_NUMBER "2" at 30.146,11.572 h0.51 r180
C159: PIN_NUMBER "1" at 37.348,11.45 h0.51; PIN_NUMBER "2" at 37.348,10.55 h0.51
C160: PIN_NUMBER "1" at 32.341,15.15 h0.51 r180; PIN_NUMBER "2" at 32.341,16.05 h0.51 r180
C161: PIN_NUMBER "1" at 32.595,13.797 h0.51 r270; PIN_NUMBER "2" at 31.695,13.797 h0.51 r270
C162: PIN_NUMBER "1" at 35.412,14.604 h0.51 r180; PIN_NUMBER "2" at 35.412,15.504 h0.51 r180
C163: PIN_NUMBER "1" at 35.023,14.628 h0.51 r180; PIN_NUMBER "2" at 35.023,15.528 h0.51 r180
C164: PIN_NUMBER "1" at 28.934,15.986 h0.51 r90; PIN_NUMBER "2" at 29.834,15.986 h0.51 r90
C165: PIN_NUMBER "2" at 24.945,10.042 h0.64; PIN_NUMBER "1" at 24.945,8.142 h0.64
C166: PIN_NUMBER "2" at 22.745,10.042 h0.64; PIN_NUMBER "1" at 22.745,8.142 h0.64
C167: PIN_NUMBER "1" at 37.894,15.603 h0.51 r90; PIN_NUMBER "2" at 38.795,15.603 h0.51 r90
C168: PIN_NUMBER "1" at 24.945,8.142 h0.64; PIN_NUMBER "2" at 24.945,10.042 h0.64
C169: PIN_NUMBER "2" at 43.145,9.842 h0.64; PIN_NUMBER "1" at 43.145,7.942 h0.64
C170: PIN_NUMBER "2" at 45.345,9.842 h0.64; PIN_NUMBER "1" at 45.345,7.942 h0.64